# EAGLE board HW3 (EAGLE 8.7.1)
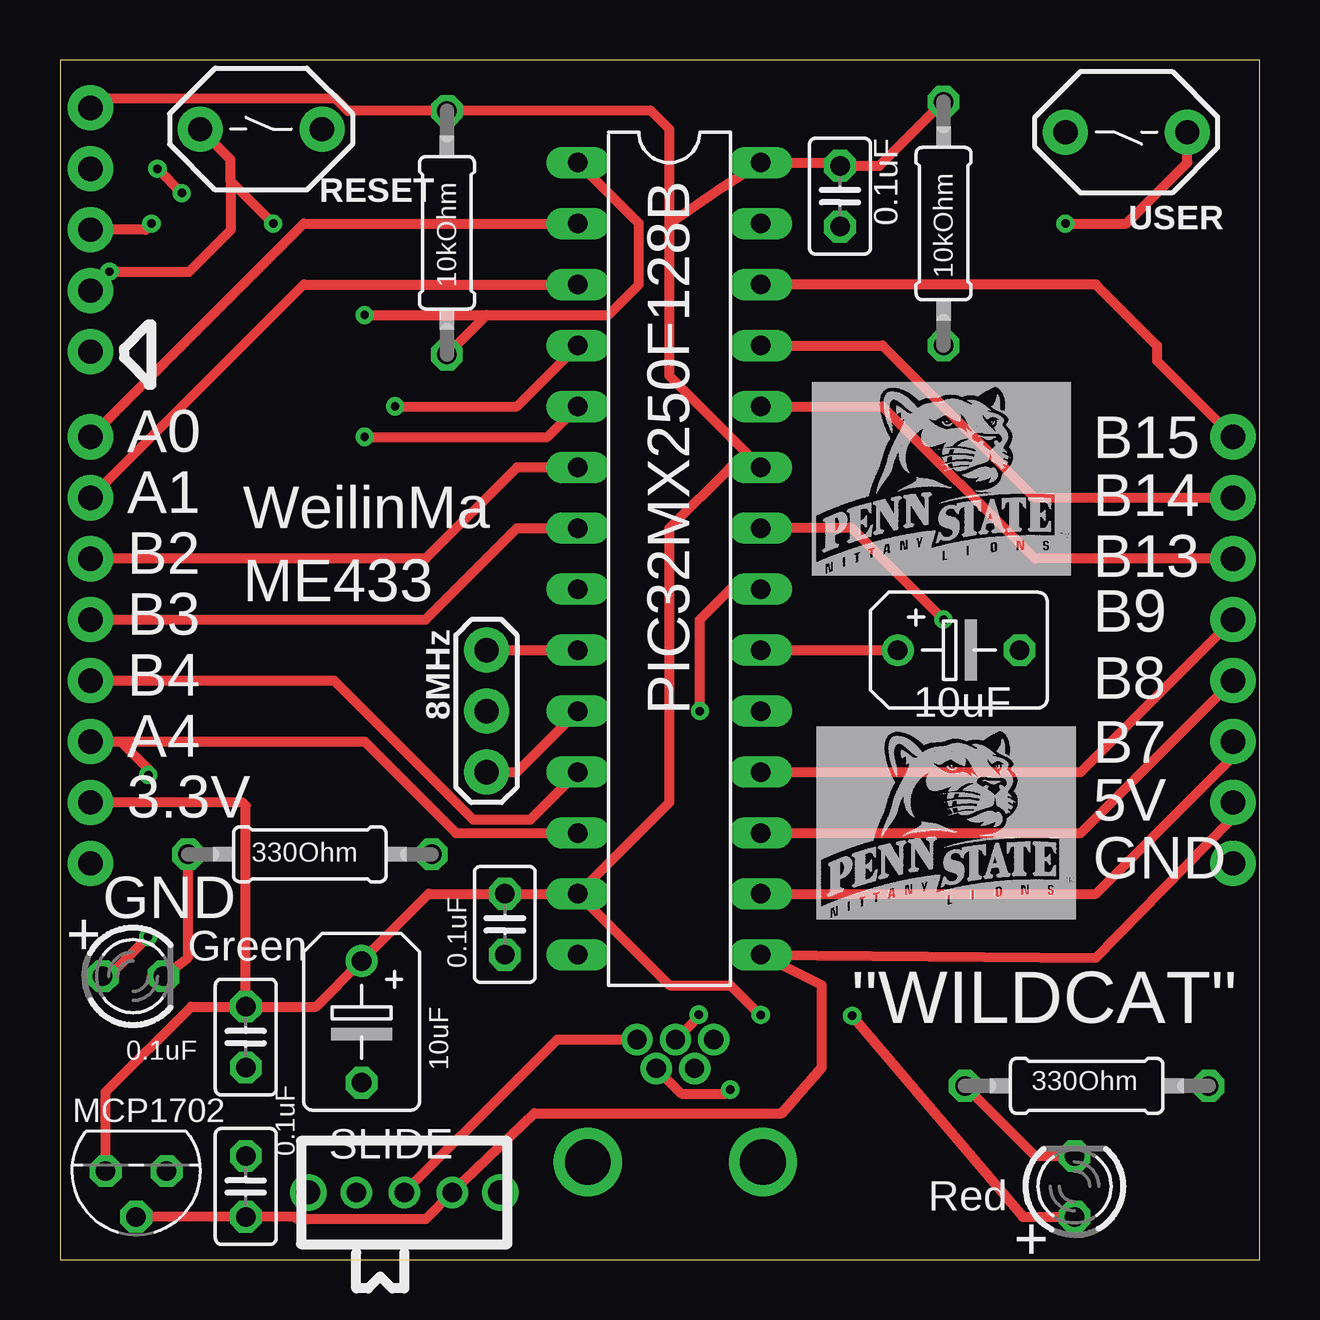
[diagram p0: board, top side]
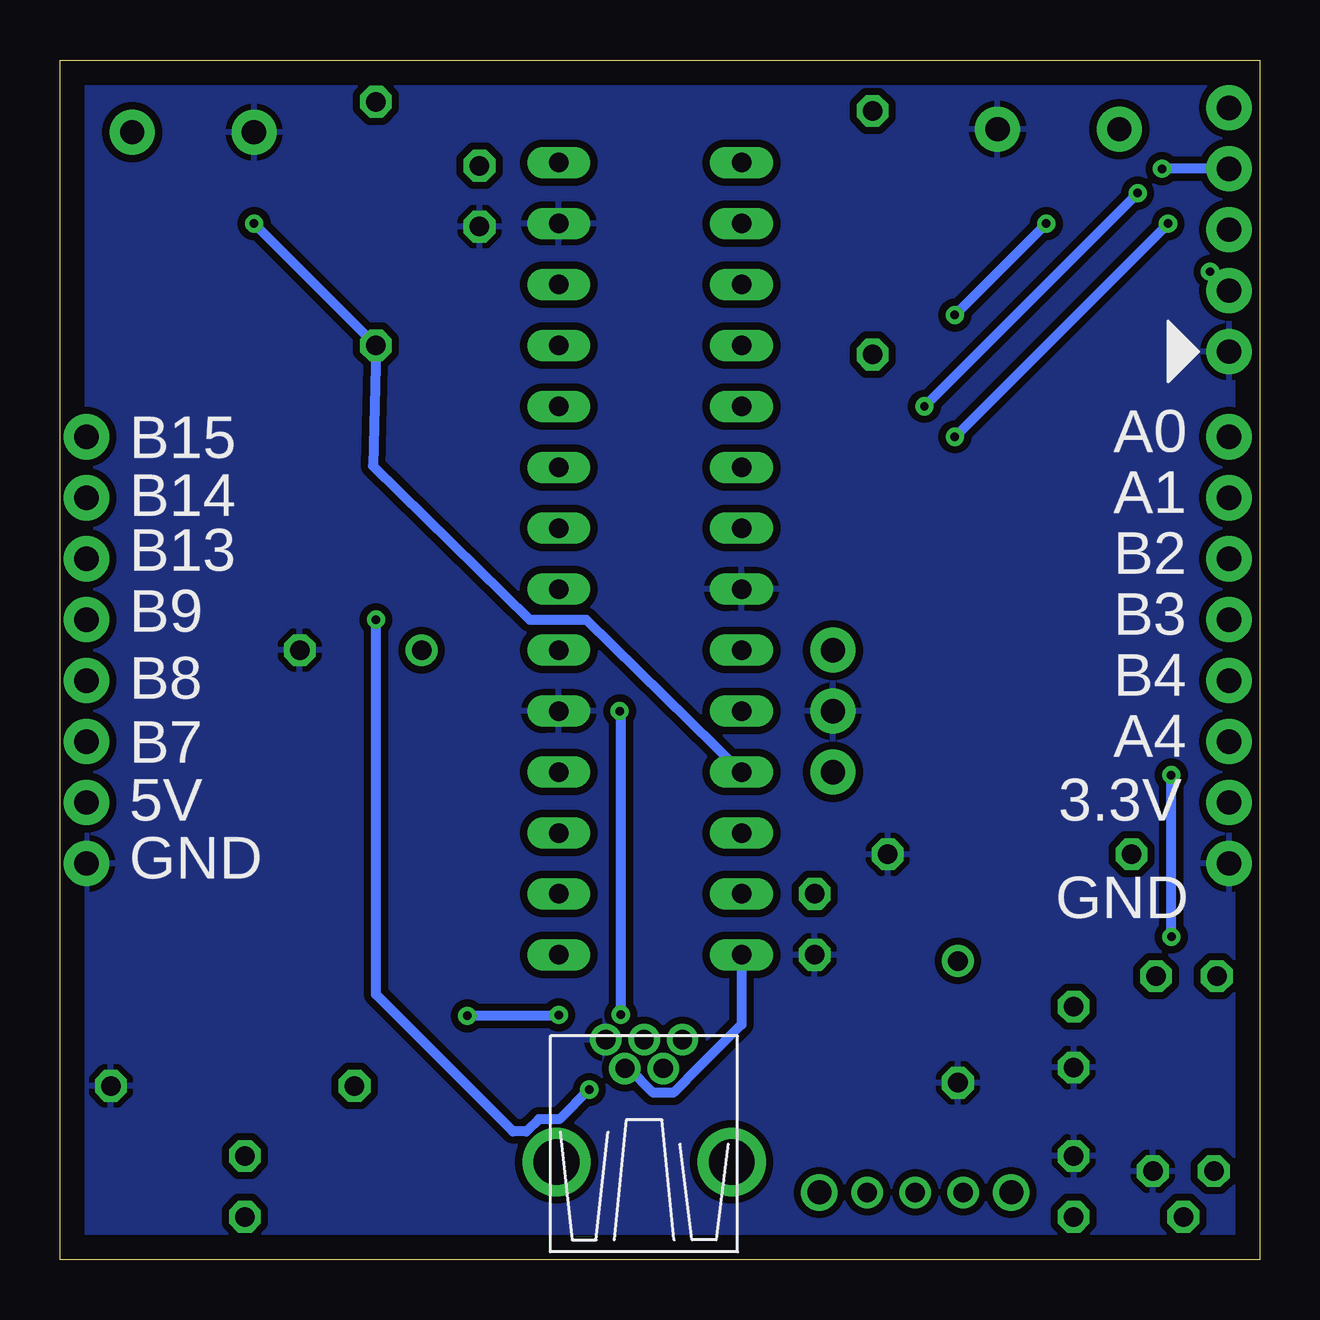
[diagram p1: board, bottom side, seen from below]

Size 50 x 50 mm. Coordinates in mm from the lower left corner, seen from the top.
Outline: 0,0 50,0 50,50 0,50 0,0
Copper layers (1*16): Top 0.035mm / dielectric 1.5mm / Bottom 0.035mm
Design rules "default": minimum track width 6mil, minimum drill 0.35mm, track to track 6mil, track to pad 6mil, pad to pad 6mil, via to via 6mil, smd to smd 6mil, copper to edge 40mil, drill to drill 6mil, minimum pad ring 10mil, minimum via ring 8mil, stop-mask expansion 4mil, vias tented up to drill 0mil, thermal gap 10mil

## Footprints (pad centres in the part's own frame; a part is rotated, then mirrored left to right if it is on the bottom)
C025-025X050 = drill 0.813 octagon: 1 -1.27,0; 2 1.27,0
B45181B = drill 0.813: + -2.54,0 | drill 0.813 octagon: - 2.54,0
USB-MB-H = drill 0.8: D+ 5.1,0; D- 3.9,0.8; GND 5.1,-1.6; ID 3.9,-0.8; VBUS 5.1,1.6 | drill 1.9: P$6 0,-3.65; P$7 0,3.65
LED3MM = drill 0.813 octagon: A -1.27,0; K 1.27,0
OSC = drill 1.016 pad 1.88: 1 -2.54,0; 2 0,0; 3 2.54,0
0207/10 = drill 0.813 octagon: 1 -5.08,0; 2 5.08,0
DIL28-3 = drill 0.813 long: 1 -16.51,-3.81; 2 -13.97,-3.81; 3 -11.43,-3.81; 4 -8.89,-3.81; 5 -6.35,-3.81; 6 -3.81,-3.81; 7 -1.27,-3.81; 8 1.27,-3.81; 9 3.81,-3.81; 10 6.35,-3.81; 11 8.89,-3.81; 12 11.43,-3.81; 13 13.97,-3.81; 14 16.51,-3.81; 15 16.51,3.81; 16 13.97,3.81; 17 11.43,3.81; 18 8.89,3.81; 19 6.35,3.81; 20 3.81,3.81; 21 1.27,3.81; 22 -1.27,3.81; 23 -3.81,3.81; 24 -6.35,3.81; 25 -8.89,3.81; 26 -11.43,3.81; 27 -13.97,3.81; 28 -16.51,3.81
SLIDE = drill 0.8: 1 -2,0; 2 0,0; 3 2,0 | drill 1: P$1 -4,0; P$2 4,0
TO92 = drill 0.813 octagon: 1 -1.27,0; 2 0,1.905; 3 1.27,0
PB = drill 1.016 pad 1.88: 1 -2.54,0; 2 2.54,0
1X08 = drill 1.016 pad 1.88: 1 0,0; 2 2.54,0; 3 5.08,0; 4 7.62,0; 5 10.16,0; 6 12.7,0; 7 15.24,0; 8 17.78,0
1X05 = drill 1.016 pad 1.88: 1 0,0; 2 2.54,0; 3 5.08,0; 4 7.62,0; 5 10.16,0

## Placement (x,y rotation side)
C1  0.1uF  [C025-025X050]  32.51,44.32 270 top
C2  0.1uF  [C025-025X050]  18.54,13.97 270 top
C3  0.1uF  [C025-025X050]  7.75,3.05 90 top
C4  0.1uF  [C025-025X050]  7.75,9.27 270 top
C5  10uF  [B45181B]  37.47,25.4 0 top
C6  10uF  [B45181B]  12.57,9.91 270 top
J1  USB-MB-H  [USB-MB-H]  25.65,4.06 90 top
LED1  Red  [LED3MM]  42.29,3.05 90 top
LED2  Green  [LED3MM]  3.05,11.81 0 top
OSC  8MHz  [OSC]  17.78,22.86 270 top
R1  330Ohm  [0207/10]  42.8,7.24 180 top
R2  330Ohm  [0207/10]  10.41,16.89 180 top
R3  10kOhm  [0207/10]  16.13,42.8 90 top
R4  10kOhm  [0207/10]  36.83,43.18 90 top
U$1  PIC32MX250F128B  [DIL28-3]  25.4,29.21 270 top
U$2  SLIDE  [SLIDE]  14.35,2.79 180 top
U$3  MCP1702  [TO92]  3.17,3.68 180 top
U$4  RESET  [PB]  8.38,47.12 0 top
U$5  USER  [PB]  44.45,46.99 180 top
U$6  CONN_08  [1X08]  1.27,16.51 90 top
U$7  CONN_08  [1X08]  48.9,16.51 90 top
U$8  PICKIT3  [1X05]  1.27,37.85 90 bottom

## Library data of the parts
C1-C6 J1 OSC R1-R4 U$1-U$8 = HW2
LED1 LED2 = led

## Nets
+3V3: C1.1 C2.1 C4.1 C6.+ LED1.A R3.2 R4.2 U$1.13 U$1.23 U$1.28 U$3.3 U$6.2 U$8.5
+5V: C3.1 U$1.15 U$2.1 U$3.2 U$7.2
A0: U$1.2 U$6.8
A1: U$1.3 U$6.7
A4/LED: LED2.A U$1.12 U$6.3
B2: U$1.6 U$6.6
B3: U$1.7 U$6.5
B4/USER: R4.1 U$1.11 U$5.1 U$6.4
B7: U$1.16 U$7.3
B8: U$1.17 U$7.4
B9: U$1.18 U$7.5
B13: U$1.24 U$7.6
B14: U$1.25 U$7.7
B15: U$1.26 U$7.8
D+: J1.D+ U$1.21
D-: J1.D- U$1.22
GND: C1.2 C2.2 C3.2 C4.2 C5.- C6.- J1.GND OSC.2 R1.1 R2.1 U$1.8 U$1.19 U$1.27 U$3.1 U$4.2 U$5.2 U$6.1 U$7.1 U$8.1
MCLR: R3.1 U$1.1 U$4.1 U$8.2
N$2: J1.VBUS U$2.2
N$5: LED1.K R1.2
N$6: LED2.K R2.2
N$7: OSC.1 U$1.9
N$8: OSC.3 U$1.10
N$10: C5.+ U$1.20
PGC: U$1.5 U$8.3
PGD: U$1.4 U$8.4
USBID: J1.ID U$1.14

## Tracks (layer width: path | path; a pad name or v marks a point on that pad's centre or on a via)
+3V3  (via drill 0.35)
  Top 0.406: C4.1 10.67,10.54 C6.+ 15.37,15.24 C2.1 U$1.13 | U$1.13 25.4,19.05 25.4,30.48 27.94,33.02 U$1.23 25.4,36.83 25.4,43.18 | 25.4,43.18 27.43,44.58 U$1.28 32.38,45.72 C1.1 34.16,45.59 R4.2 | 25.4,43.18 25.4,47.12 24.64,47.88 R3.2 11.99,47.88 11.46,48.41 1.68,48.41 U$8.5 | C4.1 7.75,18.92 7.62,19.05 U$6.2 | U$1.13 25.4,11.43 27.94,11.43 29.21,10.16 v29.21,10.19 | v33.02,10.16 40.13,1.78 LED1.A | U$3.3 1.91,6.99 5.46,10.54 C4.1
  Bottom 0.406: v29.21,10.19 29.24,10.16 v33.02,10.16
+5V
  Top 0.406: U$3.2 C3.1 9.8,1.78 9.89,1.68 15.24,1.68 U$2.1 19.78,6.1 30.1,6.1 31.75,8 31.75,11.43 U$1.15 43.18,12.57 48.78,18.3 48.78,19.05 U$7.2
A0
  Top 0.406: U$6.8 10.16,43.18 U$1.2
A1
  Top 0.406: U$6.7 10.16,40.64 U$1.3
A4/LED  (via drill 0.35)
  Top 0.406: U$6.3 2.54,21.59 | 2.54,21.59 12.7,21.59 16.51,17.78 U$1.12 | v3.68,20.19 3.68,20.45 2.54,21.59 | LED2.A 2.03,11.81 v3.67,13.45
  Bottom 0.406: v3.67,13.45 3.68,16.13 v3.68,20.19
B2
  Top 0.406: U$1.6 19.05,33.02 15.24,29.21 U$6.6
B3
  Top 0.406: U$6.5 15.24,26.67 19.05,30.48 U$1.7
B4/USER  (via drill 0.35)
  Top 0.406: U$6.4 11.43,24.13 17.22,18.34 19.61,18.34 U$1.11 | v41.91,43.18 44.45,43.18 46.99,45.72 U$5.1
  Bottom 0.406: U$1.11 28.07,26.67 30.42,26.67 36.96,33.08 R4.1 v41.91,43.18
B7
  Top 0.406: U$1.16 43.18,15.24 48.78,20.84 48.78,21.59 U$7.3
B8
  Top 0.406: U$1.17 42.55,17.78 48.78,24.02 | 48.78,24.02 48.78,24.13 | U$7.4 48.78,24.02
B9
  Top 0.406: U$1.18 42.55,20.32 48.78,26.56 | 48.78,26.56 48.78,26.67 | U$7.5 48.78,26.56
B13
  Top 0.406: U$1.24 34.29,35.56 40.64,29.21 U$7.6
B14
  Top 0.406: U$1.25 34.29,38.1 40.64,31.75 U$7.7
B15
  Top 0.406: U$1.26 43.18,40.64 45.72,38.1 45.72,37.47 48.78,34.4 | 48.78,34.4 48.78,34.29 | U$7.8 48.78,34.4
D+  (via drill 0.35)
  Top 0.406: J1.D+ 26.65,10.16 26.67,10.16 v26.62,10.21 | v26.67,22.86 26.67,26.67 27.94,27.94 U$1.21
  Bottom 0.406: v26.62,10.21 26.62,22.81 v26.67,22.86
D-  (via drill 0.35)
  Top 0.406: J1.D- 25.91,6.91 27.77,6.91 v27.94,7.08 | v36.83,26.67 33.02,30.48 U$1.22
  Bottom 0.406: v27.94,7.08 29.18,5.84 30.04,5.84 30.55,5.33 31.11,5.33 36.83,11.05 v36.83,26.67
GND
  pour Bottom (isolate 0.305): 0.2,49.66 49.66,49.73 49.83,0.15 0.18,0.1
MCLR  (via drill 0.35)
  Top 0.406: U$4.1 7.11,45.85 7.11,44.96 | 7.11,44.96 7.11,42.9 5.38,41.18 v2.06,41.18 | v8.89,43.18 7.11,44.96 | v12.7,39.37 17.78,39.37 | 17.78,39.37 22.86,39.37 24.13,40.64 24.13,43.18 U$1.1 | R3.1 17.78,39.37
  Bottom 0.406: U$8.2 v2.06,41.18 | v8.89,43.18 v12.7,39.37
N$2
  Top 0.406: J1.VBUS 20.72,9.16 19.11,7.56 U$2.2
N$5
  Top 0.406: R1.2 40.64,4.32 LED1.K
N$6
  Top 0.406: LED2.K 5.33,12.57 R2.2
N$7
  Top 0.406: OSC.1 U$1.9
N$8
  Top 0.406: OSC.3 19.05,20.32 U$1.10
N$10
  Top 0.406: U$1.20 C5.+
PGC  (via drill 0.35)
  Top 0.406: U$1.5 20.32,34.29 v12.7,34.29 | v3.81,43.18 3.56,42.93 U$8.3
  Bottom 0.406: v3.81,43.18 v12.7,34.29
PGD  (via drill 0.35)
  Top 0.406: v4.06,45.47 v5.08,44.45 | U$1.4 19.05,35.56 v13.97,35.56
  Bottom 0.406: U$8.4 v4.06,45.47 | v5.08,44.45 v13.97,35.56
USBID
  Bottom 0.406: J1.ID 26.28,7.96 25.27,6.95 24.44,6.95 23.32,8.07 23.04,8.35 21.59,9.8 U$1.14

## Text on the board
tPlace: A0 | B15 | A1 | B14 | WeilinMa | B2 | B13 | ME433 | B3 | B9 | B4 | B8 | A4 | B7 | 3.3V | 5V | GND | GND | + | "WILDCAT" | +
bPlace: A0 | B15 | A1 | B14 | B2 | B13 | B3 | B9 | B4 | B8 | A4 | B7 | 3.3V | 5V | GND | GND